# Altium PCB Attiny.PcbDoc
Units mm, origin at the board's own origin, x right, y up, seen from the top; angles counter-clockwise.
Board outline 17.4 x 33.4 mm, 2 copper layers (Top Layer, Bottom Layer); 4 components, 20 nets, 46 pads, 2 vias.
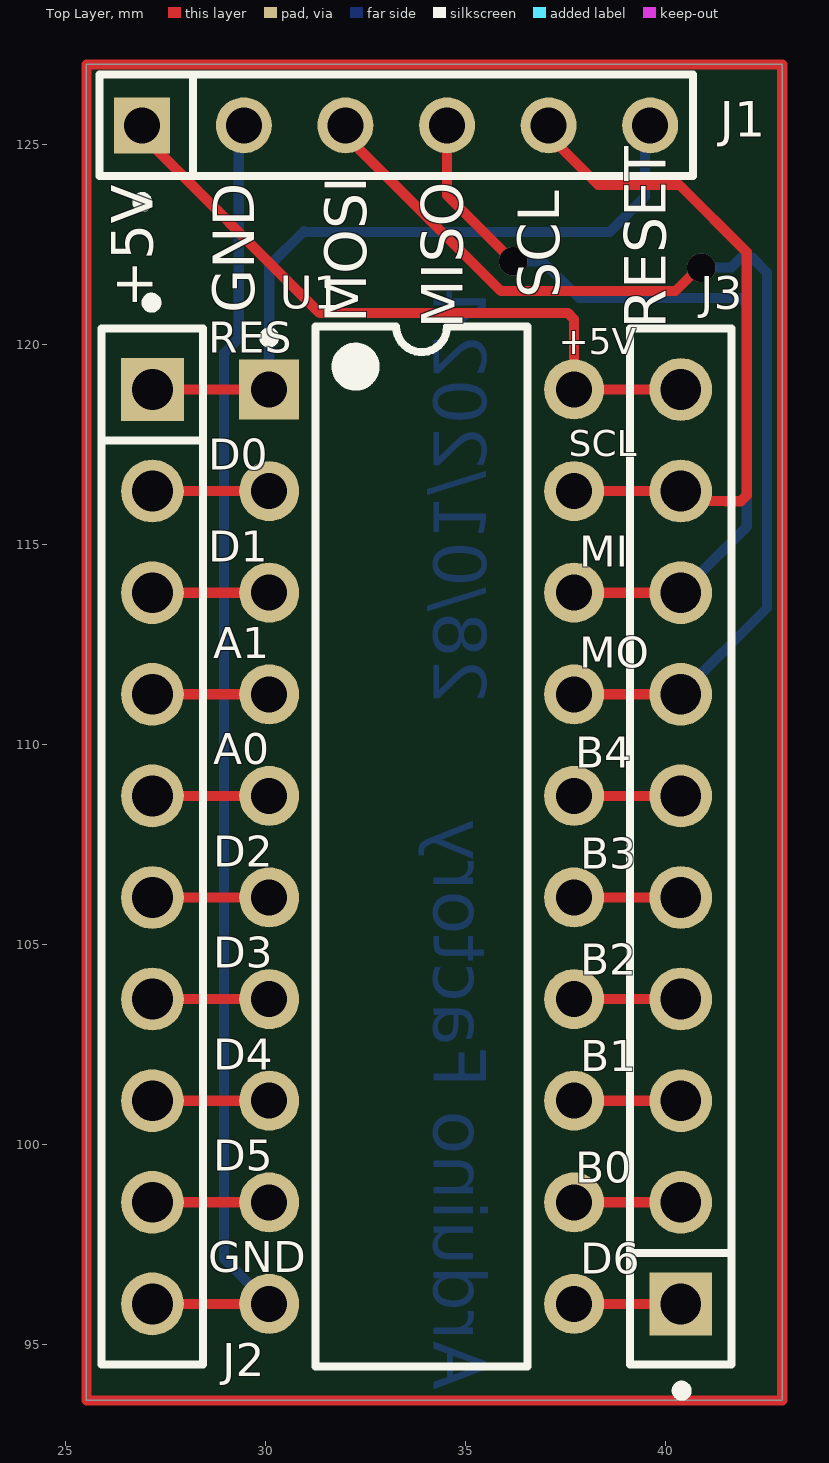
[diagram p0: Top Layer view]
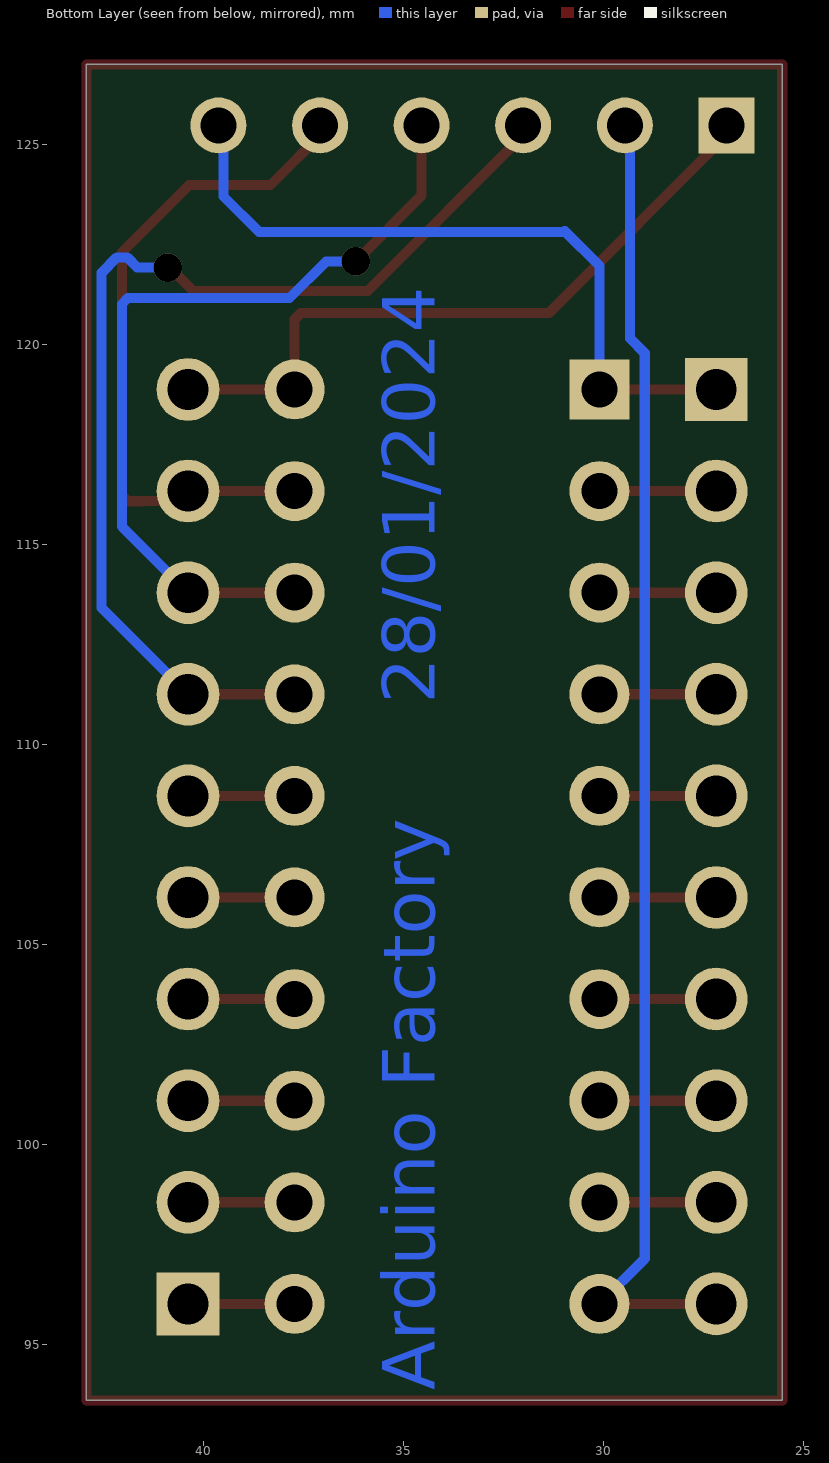
[diagram p1: Bottom Layer view, seen from below]
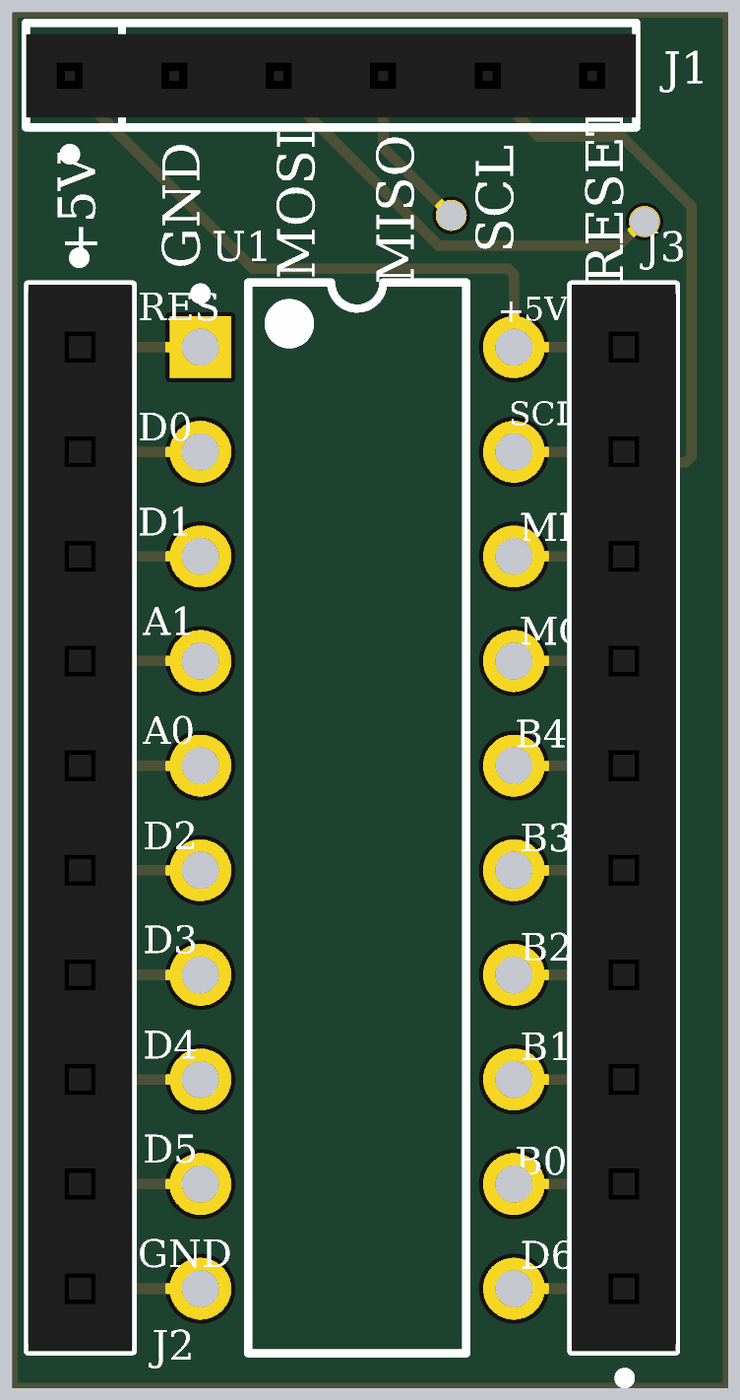
[diagram p2: 3D render of the assembled board from above, using the file's embedded part models]

## Layer stack, top to bottom
Top Solder: solder mask 0.0102, Solder Resist, Dk 3.5
Top Layer: signal copper 0.0356
Dielectric 1: dielectric 0.32, FR-4, Dk 4.8
Bottom Layer: signal copper 0.0356
Bottom Solder: solder mask 0.0102, Solder Resist, Dk 3.5

## Board outline
25.527,93.599 25.527,127 42.926,127 42.926,93.599

## Design rules (kind name [scope] priority, off if disabled: settings)
Clearance [All] p1: gap=0.254 ignorepadtopadclearanceinfootprint=FALSE
PolygonConnect [All] p1: connectstyle=Relief reliefconductorwidth=0.254 reliefentries=4 polygonreliefangle="90 Angle" airgapwidth=0.254
RoutingVias [All] p1: holewidth=0.711 width=1.27 viastyle="Through Hole" minholewidth=0.711 minwidth=1.27 maxholewidth=0.711 maxwidth=1.27
SolderMaskExpansion [All] p1: expansion=0.102 istentingtop=FALSE
Width [All] p1: maxlimit=0.254 minlimit=0.254 preferedwidth=0.254
30 further rules are at their usual default settings.

## Components (designator, comment, footprint, x,y, rotation, side; value= is the part's Value field where it differs from the comment)
J1 "Conn_TE_87224-6_eec" TE_87224-6_0 33.274,125.476 r90 top
J2 "Conn_Sullins_PPTC101LFBN-RC_eec" Sullins_PPTC101LFBN-RC_0 27.178,107.442 r270 top
J3 "Conn_Sullins_PPTC101LFBN-RC_eec" Sullins_PPTC101LFBN-RC_0 40.386,107.442 r90 top
U1 "ATTINY2313A-PU" 20P3 33.909,107.442 r0 top

## Footprints (in the part's own frame and the unit in brackets; to place one, negate y for a bottom-side part, rotate by r counter-clockwise, add the part's x,y. Pads: shape width x height; smd on the part's side, far side on the other; paste and mask are expansions set on the pad)
20P3 [mm] "DIP, 20-Pin, Row Spacing 7.62 mm, Pitch 2.54 mm"
  rect 1.5x1.5 hole 0.9: 1(-3.81,11.43)
  round 1.5 hole 0.9: 2(-3.81,8.89) 3(-3.81,6.35) 4(-3.81,3.81) 5(-3.81,1.27) 6(-3.81,-1.27) 7(-3.81,-3.81) 8(-3.81,-6.35) 9(-3.81,-8.89) 10(-3.81,-11.43) 11(3.81,-11.43) 12(3.81,-8.89) 13(3.81,-6.35) 14(3.81,-3.81) 15(3.81,-1.27) 16(3.81,1.27) 17(3.81,3.81) 18(3.81,6.35) 19(3.81,8.89) 20(3.81,11.43)
  silkscreen extent -3.93,-13 2.65,13, body extent -3.6,-12.95 3.6,12.95, height 5.08
Sullins_PPTC101LFBN-RC_0 [mm]
  rect 1.57x1.57 hole 1.02 paste-2539.97 mask+0: 1(-11.43,0)
  round 1.57 hole 1.02 paste-2539.97 mask+0: 2(-8.89,0) 3(-6.35,0) 4(-3.81,0) 5(-1.27,0) 6(1.27,0) 7(3.81,0) 8(6.35,0) 9(8.89,0) 10(11.43,0)
  silkscreen extent -13.72,-1.27 12.95,1.27, body extent -13.23,-1.47 13.23,1.47, height 0.25
TE_87224-6_0 [mm]
  rect 1.4x1.4 hole 0.9 paste-2539.97 mask+0: 1(0,6.35)
  round 1.4 hole 0.9 paste-2539.97 mask+0: 2(0,3.81) 3(0,1.27) 4(0,-1.27) 5(0,-3.81) 6(0,-6.35)
  silkscreen extent -2.04,-7.42 1.27,7.42, body extent -1.37,-7.52 1.37,7.52, height 0.25

## Part data
J1: "CONN HEADER VERT .100 6POS 15AU", Digikey Part Number=A26551-ND, Manufacturer=TE, Mouser Part Number=571-872246, Package=CONN_PTH_HDR6, Part Number=87224-6, Temperature="-65°C to +105°C", Temperature Range High=+105°C, Temperature Range Low=-65°C, ComponentLink1Description=Upverter, ComponentLink1URL=https://upverter.com/upn/revision/5cdf6967ba71a8d5/, ComponentLink2Description=Datasheet, ComponentLink2URL=http://www.te.com/commerce/DocumentDelivery/DDEController?Action=srchrtrv&DocNm=87224&DocType=Customer+Drawing&DocLang=English, Digikey Description="CONN HEADER VERT .100 6POS 15AU", helpURL=https://upverter.com/upn/revision/5cdf6967ba71a8d5/, Ipc Land Pattern Name=HDRV6W64P254_1X6_1483X64X229, Lead Free=yes, Number of Positions=6, Price=2.04212257321, RoHS=TRUE, Supplier 1=Digi-Key, Supplier 2=Mouser, Supplier Part Number 1=A26551-ND, Supplier Part Number 2=571-872246
J2 J3: "CONN HEADER FEMALE 10POS.1\" TIN", Digikey Part Number=S7008-ND, Manufacturer=Sullins, Octopart Part Number=a3ed6ae3a4397c2a, Package=HDR10, Part Number=PPTC101LFBN-RC, Temperature="-40°C to +105°C", Temperature Range High=+105°C, Temperature Range Low=-40°C, Category 75Fab8F04590Ae3D="Connectors and Adapters", Category 0836C53C3D42D3F1=Connectors, Category A3C16Ecb93907806=Uncategorized, Category Bda670Ac885E6661=Uncategorized, Category E7012A0Bd22E3Cc6="Headers & Receptacles", ComponentLink1Description=Upverter, ComponentLink1URL=https://upverter.com/upn/revision/438243a39a4aeeed/, ComponentLink2Description=Datasheet, ComponentLink2URL=http://www.sullinscorp.com/drawings/78_P(N)PxCxxxLFBN-RC,_10492-H.pdf, contact_material="Phosphor Bronze", Digikey Description="CONN HEADER FEMALE 10POS.1\" TIN", helpURL=https://upverter.com/upn/revision/438243a39a4aeeed/, housing_material=Plastic, Is Female=yes, Lead Free=yes, Mounting Type="through hole", Num Pins=10, number_of_positions=10, number_of_rows=1, pin_pitch="2.54 mm", Price=0.506714616829, RoHS=TRUE, Supplier 1=Digi-Key, Supplier 2=Mouser, Supplier Part Number 1=S7008-ND, Symbol 0 0=Standard, Type="integrated circuit"
U1: "8-bit AVR Microcontroller, 1.8-5.5V, 2KB Flash, 128 Bytes EEPROM, 128 Bytes SRAM, 20-pin PDIP, Industrial Grade (-40°C to 85°C), Pb-Free", Code_JEDEC=MS-001-AD, DatasheetVersion="revA, Dec-2009", PackageDescription="20-lead (0.300\"/7.62mm Wide) Plastic Dual Inline Package (PDIP)", PackageReference=20P3, PackageVersion="revC, Jan-2004", PartNumber=ATTINY2313A-PU

## Via types
v1: diameter 0.711, hole 0.711, Top Layer to Bottom Layer, 2 vias

## Nets (pads, with @x,y where several pads share a name; then routed paths per layer and width w, separated by ;. In a path a pad name is that pad's centre, name@x,y a point inside that pad or via, vN(x,y) a via of type N, cw(c..) or ccw(c..) an arc to the next point about the centre after c; other vN are vias at no path point)
+5: J1.1 J3.10 U1.20 | length 17.3
  Top Layer w0.254: J1.1@26.797,125.349 31.365,120.781 37.57,120.781 37.719,120.632 U1.20 J3.10
GND: J1.2 J2.10 U1.10 | length 32.9
  Top Layer w0.254: J2.10 U1.10
  Bottom Layer w0.254: J1.2@29.337,125.349 29.337,120.149 28.968,119.78 28.968,97.143 U1.10
MISO: J1.4 J3.8 U1.18 | length 20.9
  Top Layer w0.254: J1.4@34.417,125.349 34.544,125.222 34.544,123.724 v1(36.195,122.072) ; U1.18 J3.8
  Bottom Layer w0.254: v1(36.195,122.072) 36.932,122.072 37.846,121.158 41.888,121.158 42.037,121.009 42.037,115.443 J3.8
MOSI: J1.3 J3.7 U1.17 | length 26.9
  Top Layer w0.254: J1.3@31.877,125.349 35.89,121.336 40.257,121.336 40.841,121.92 v1(40.894,121.92) ; U1.17 J3.7
  Bottom Layer w0.254: J3.7 42.545,113.411 42.545,121.793 42.164,122.174 41.907,122.174 41.653,121.92 v1(40.894,121.92)
PA0: J2.5 U1.5 | length 2.9
  Top Layer w0.254: J2.5 U1.5
PA1: J2.4 U1.4 | length 2.9
  Top Layer w0.254: J2.4 U1.4
PB0: J3.2 U1.12 | length 2.7
  Top Layer w0.254: U1.12 J3.2
PB1: J3.3 U1.13 | length 2.7
  Top Layer w0.254: U1.13 J3.3
PB2: J3.4 U1.14 | length 2.7
  Top Layer w0.254: U1.14 J3.4
PB3: J3.5 U1.15 | length 2.7
  Top Layer w0.254: U1.15 J3.5
PB4: J3.6 U1.16 | length 2.7
  Top Layer w0.254: U1.16 J3.6
PD0: J2.2 U1.2 | length 2.9
  Top Layer w0.254: J2.2 U1.2
PD1: J2.3 U1.3 | length 2.9
  Top Layer w0.254: J2.3 U1.3
PD2: J2.6 U1.6 | length 2.9
  Top Layer w0.254: J2.6 U1.6
PD3: J2.7 U1.7 | length 2.9
  Top Layer w0.254: J2.7 U1.7
PD4: J2.8 U1.8 | length 2.9
  Top Layer w0.254: J2.8 U1.8
PD5: J2.9 U1.9 | length 2.9
  Top Layer w0.254: J2.9 U1.9
PD6: J3.1 U1.11 | length 2.8
  Top Layer w0.254: U1.11 40.132,96.012 J3.1@40.386,96.266
RESET: J1.6 J2.1 U1.1 | length 17.8
  Top Layer w0.254: J2.1 U1.1
  Bottom Layer w0.254: U1.1 30.099,121.964 30.966,122.831 30.988,122.809 38.608,122.809 39.497,123.698 J1.6@39.497,125.349
SCL: J1.5 J3.9 U1.19 | length 16.9
  Top Layer w0.254: J1.5@36.957,125.349 38.324,123.982 40.356,123.982 42.037,122.301 42.037,116.227 41.888,116.078 41.504,116.078 41.502,116.08 40.638,116.08 J3.9 U1.19
copper on no net: | length 101.6
  Top Layer w0.254: 25.527,93.599 42.926,93.599 42.926,127 25.527,127 25.527,93.599

## Other copper
Bottom Layer:
  text "Arduino Factory     28/01/2024" at 33.776,93.853 h2.25 r270

## Silkscreen, mask and mechanical layers (free items; w line width, h text height)
Top Overlay:
  text "SCL" at 37.699,121.158 h1.78 r90
  text "+5V" at 27.536,120.904 h1.78 r90
  text "GND" at 30.076,120.777 h1.78 r90
  text "MOSI" at 32.87,120.523 h1.78 r90
  text "MISO" at 35.283,120.396 h1.78 r90
  text "RESET" at 40.366,120.392 h1.78 r90
  text "RES" at 28.575,119.522 h1.32
  text "+5V" at 37.338,119.522 h1.12
  text "SCL" at 37.592,116.979 h1.12
  text "D0" at 28.575,116.603 h1.32
  text "D1" at 28.575,114.3 h1.32
  text "MI" at 37.846,114.173 h1.32
  text "A1" at 28.702,111.887 h1.32
  text "MO" at 37.846,111.65 h1.32
  text "A0" at 28.702,109.237 h1.32
  text "B4" at 37.744,109.154 h1.32
  text "D2" at 28.702,106.68 h1.32
  text "B3" at 37.871,106.632 h1.32
  text "D3" at 28.702,104.157 h1.32
  text "B2" at 37.871,103.973 h1.32
  text "D4" at 28.702,101.6 h1.32
  text "B1" at 37.871,101.56 h1.32
  text "D5" at 28.702,99.077 h1.32
  text "B0" at 37.744,98.783 h1.32
  text "GND" at 28.575,96.537 h1.32
  text "D6" at 37.871,96.497 h1.32